# Altium PCB Lora_Node_PCB.PcbDoc
Units mm, origin at the board's own origin, x right, y up, seen from the top; angles counter-clockwise.
Board outline 69.22 x 90.17 mm, 2 copper layers (Top Layer, Bottom Layer); 9 components, 20 nets, 91 pads, 28 vias.
Unrouted connection lines stored in the file: 4.
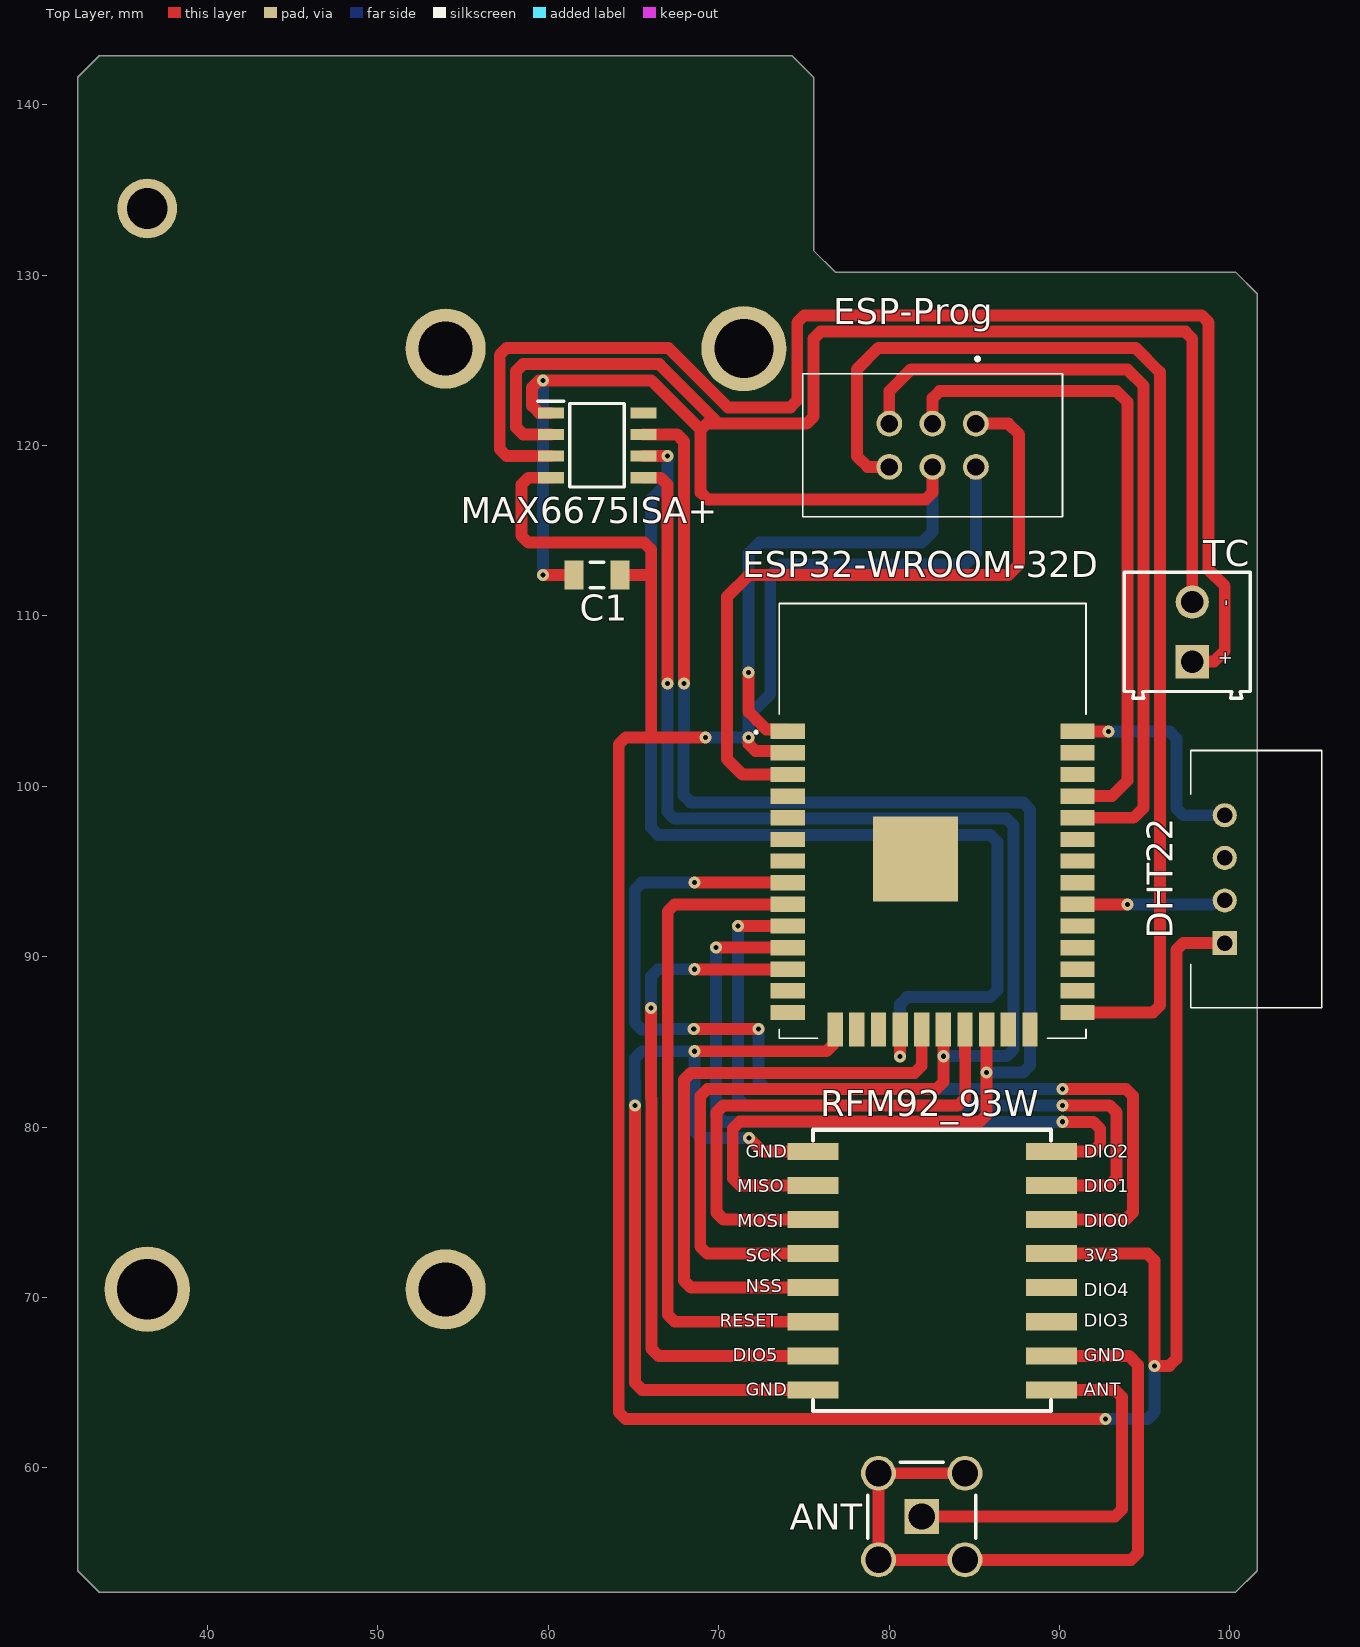
[diagram p0: Top Layer view]
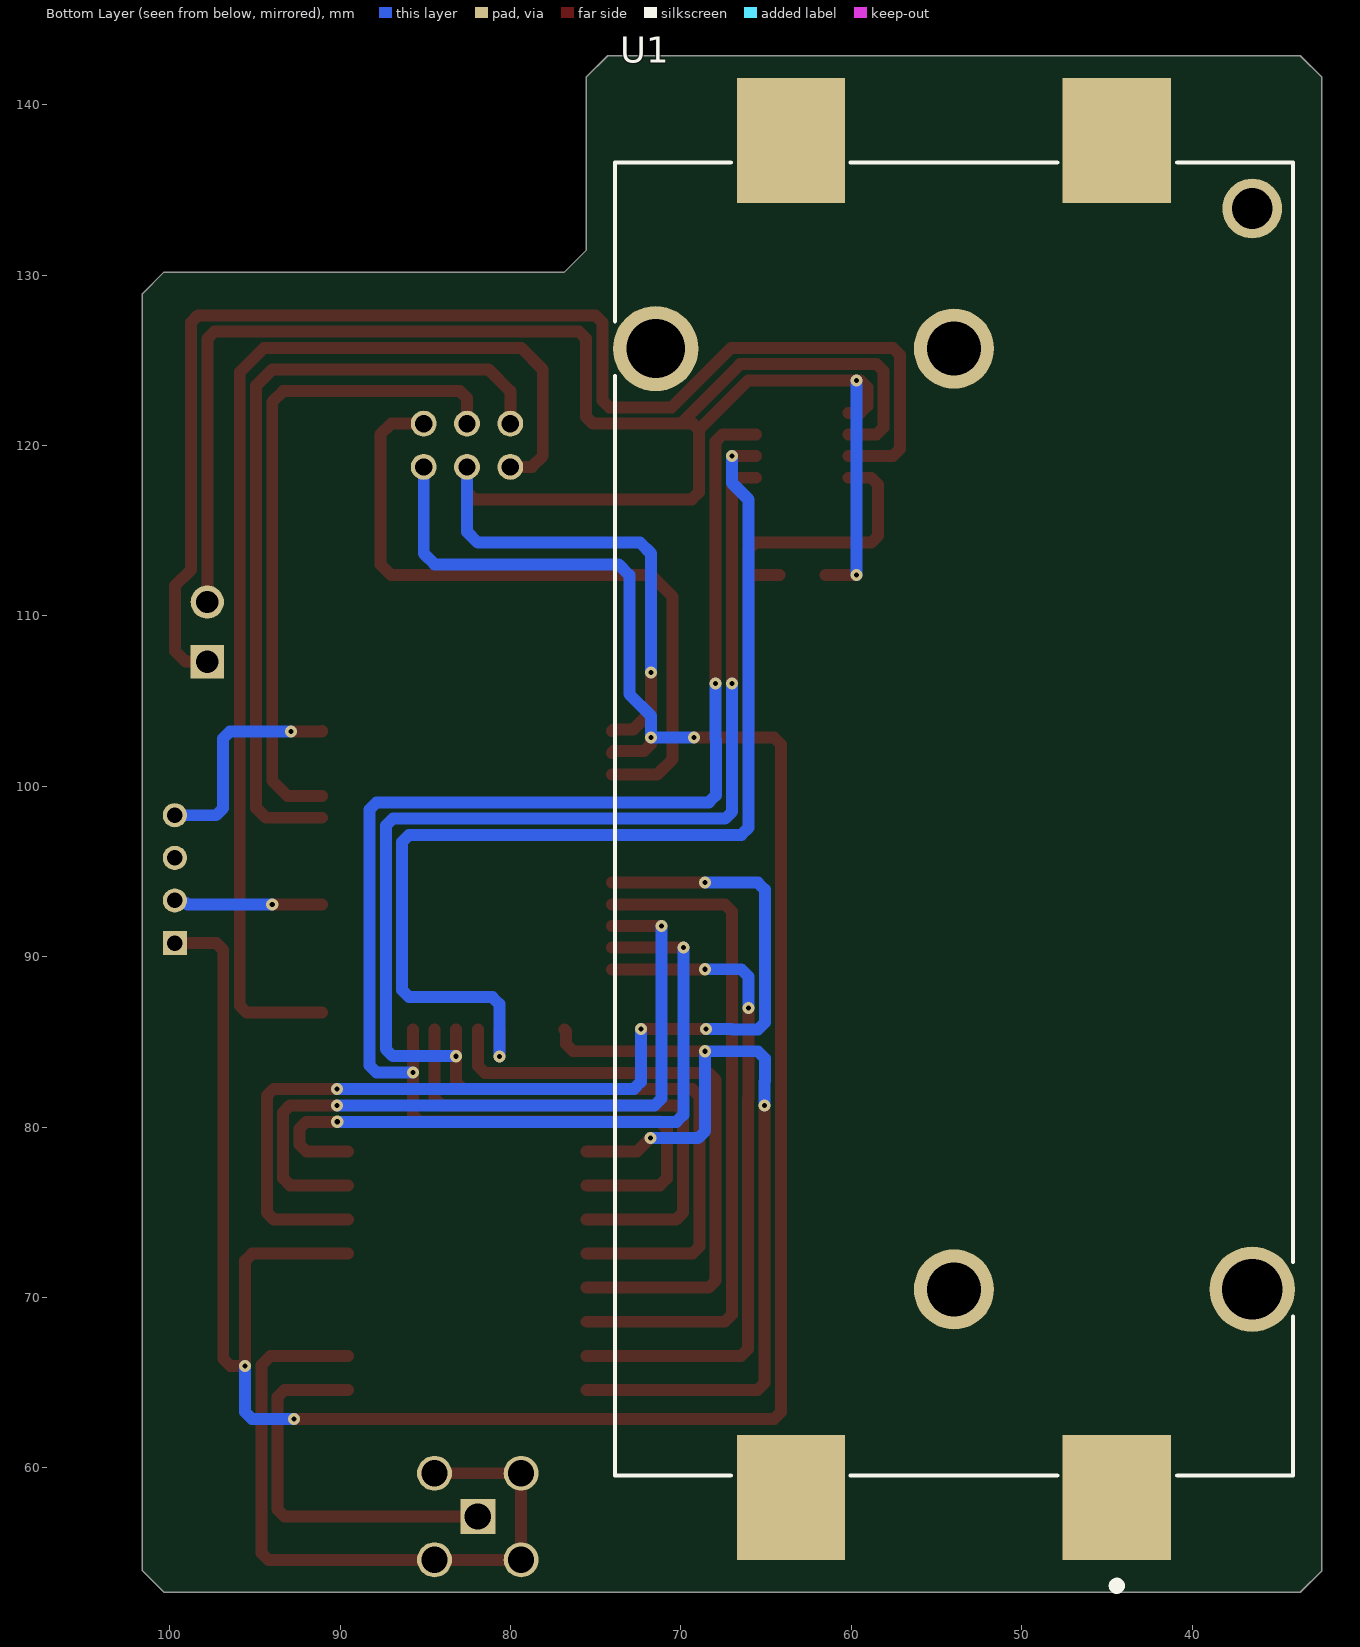
[diagram p1: Bottom Layer view, seen from below]
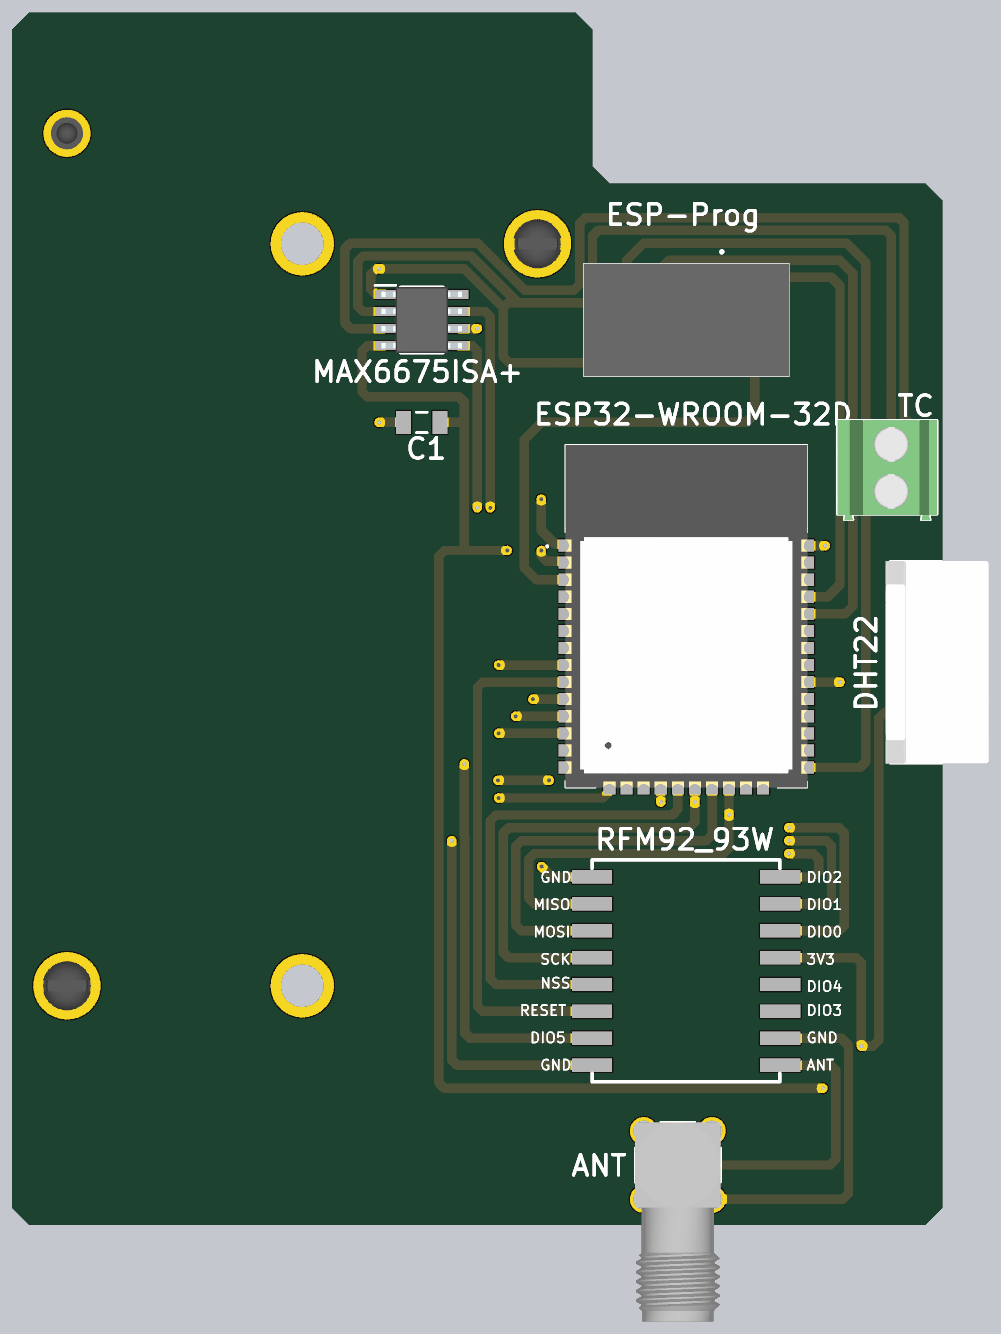
[diagram p2: 3D render of the assembled board from above, using the file's embedded part models]

## Layer stack, top to bottom
Top Solder: solder mask 0.0102, Solder Resist, Dk 3.5
Top Layer: signal copper 0.0356
Dielectric 1: dielectric 0.32, FR-4, Dk 4.8
Bottom Layer: signal copper 0.0356
Bottom Solder: solder mask 0.0102, Solder Resist, Dk 3.5

## Board outline
32.385,53.975 32.385,141.605 33.655,142.875 74.295,142.875 75.565,141.605 75.565,131.445 76.835,130.175 100.33,130.175 101.6,128.905 101.6,53.975 100.33,52.705 33.655,52.705

## Design rules (kind name [scope] priority, off if disabled: settings)
Clearance [All] p1: gap=0.254 ignorepadtopadclearanceinfootprint=FALSE except(0: Arc-Hole Track-Hole SMDPad-Hole THPad-Hole Via-Hole Fill-Hole Poly-Hole Region-Hole Text-Hole)
PolygonConnect [All] p1: connectstyle=Relief reliefconductorwidth=0.254 reliefentries=4 polygonreliefangle="90 Angle" airgapwidth=0.254
RoutingVias [All] p1: holewidth=0.711 width=1.27 viastyle="Through Hole" minholewidth=0.711 minwidth=1.27 maxholewidth=0.711 maxwidth=1.27
SolderMaskExpansion [All] p1: expansion=0.102 istentingtop=FALSE
Width [All] p1: maxlimit=1 minlimit=0.254 preferedwidth=0.7
30 further rules are at their usual default settings.

## Classes and differential pairs
component class Lora_Node_SCH: ANT C1 DHT22 ESP-Prog MAX6675ISA+ RFM92_93W TC U1

## Components (designator, comment, footprint, x,y, rotation, side; value= is the part's Value field where it differs from the comment)
ANT "731000114" MOLX-731000114_V 81.915,57.15 r90 top (schematic designator J?)
C1 "Cap Semi" C1206 62.865,112.395 r0 top value=100nF
DHT22 "DHT22" DHT22 99.695,90.805 r90 top (schematic designator IC?)
ESP32-WROOM-32D "ESP-WROOM-32D" ESPWROOM32D 82.55,97.975 r0 top (schematic designator IC1)
ESP-Prog "30306-6002HB" 303066002HB 85.09,121.285 r180 top (schematic designator J?)
MAX6675ISA+ "MAX6675ISA" SOIC127P600X175-8N 62.865,120.015 r0 top (schematic designator IC3)
RFM92_93W "RFM92_93W" RFM92_93W 75.535,78.58 r0 top (schematic designator U*)
TC "691214110002" 691214110002 97.49,109.065 r90 top (schematic designator J3)
U1 "1048" 1048 36.47,70.485 r90 bottom

## Footprints (in the part's own frame and the unit in brackets; to place one, negate y for a bottom-side part, rotate by r counter-clockwise, add the part's x,y. Pads: shape width x height; smd on the part's side, far side on the other; paste and mask are expansions set on the pad)
1048 [mm]
  rect 7.34x6.35 smd: 1(-12.225,7.95) 2(67.425,7.95) 3(67.425,27.06) 4(-12.225,27.06)
  round 4.7 hole 3.17: 5(0,17.505) 7(55.2,17.505)
  round 5 hole 3.54: 6(0,0)
  round 3.5 hole 2.39: 8(63.42,0)
  round 5 hole 3.45: 9(55.2,35.01)
  silkscreen extent -17.62,-2.38 66.13,37.4, body extent -15.4,-2.39 70.6,37.39, height 15.37
303066002HB [mm]
  round 1.519 hole 1.013: 1(0,0) 2(0,2.54) 3(2.54,0) 4(2.54,2.54) 5(5.08,0) 6(5.08,2.54)
  silkscreen extent -5.08,-3.9 10.16,5.47, body extent -5.08,-2.93 10.16,5.47, height 9.5
691214110002 [mm] "3.50 mm Horizontal Entry Modular, 2p"
  rect 1.95x1.95 hole 1.3: 1(-1.75,-0.3)
  round 1.95 hole 1.3: 2(1.75,-0.3)
  silkscreen extent -3.9,-3.7 3.5,3.7, body extent -3.95,-3.7 3.5,3.7, height 8.55
C1206 [mm] "Chip Capacitor, Body 3.2x1.6mm, IPC High Density"
  rect 1.1x1.7 smd: 1(-1.35,0) 2(1.35,0)
  silkscreen extent -0.4,-0.75 0.4,0.75, body extent -1.7,-0.9 1.7,0.9, height 1.3
DHT22 [mm]
  rect 1.416x1.416 hole 0.91: 1(0,0)
  round 1.416 hole 0.91: 2(2.5,0) 3(5,0) 4(7.5,0)
  silkscreen extent -3.8,-5.7 11.3,2, body extent -3.8,-5.36 11.3,2.34, height 25.27
ESPWROOM32D [mm]
  rect 2x0.9 smd: 1(-8.5,5.26) 2(-8.5,3.99) 3(-8.5,2.72) 4(-8.5,1.45) 5(-8.5,0.18) 6(-8.5,-1.09) 7(-8.5,-2.36) 8(-8.5,-3.63) 9(-8.5,-4.9) 10(-8.5,-6.17) 11(-8.5,-7.44) 12(-8.5,-8.71) 13(-8.5,-9.98) 14(-8.5,-11.25) 25(8.5,-11.25) 26(8.5,-9.98) 27(8.5,-8.71) 28(8.5,-7.44) 29(8.5,-6.17) 30(8.5,-4.9) 31(8.5,-3.63) 32(8.5,-2.36) 33(8.5,-1.09) 34(8.5,0.18) 35(8.5,1.45) 36(8.5,2.72) 37(8.5,3.99) 38(8.5,5.26)
  rect 0.9x2 smd: 15(-5.715,-12.25) 16(-4.445,-12.25) 17(-3.175,-12.25) 18(-1.905,-12.25) 19(-0.635,-12.25) 20(0.635,-12.25) 21(1.905,-12.25) 22(3.175,-12.25) 23(4.445,-12.25) 24(5.715,-12.25)
  rect 5x5 smd: 39(-1,-2.24)
  silkscreen extent -10.4,-12.75 9,12.75, body extent -9,-12.75 9,12.75, height 3.1
MOLX-731000114_V [mm] "Connector, 5-Leads, Body 14.8x6.35mm, Pitch 2.54mm"
  rect 2.05x2.05 hole 1.54: 1(0,0)
  round 2.05 hole 1.54: 2(-2.54,2.54) 3(-2.54,-2.54) 4(2.54,-2.54) 5(2.54,2.54)
  silkscreen extent -1.26,-3.17 3.17,3.17, body extent -11.62,-3.17 3.18,3.18, height 9.57
RFM92_93W [mm]
  rect 3x1 smd: 1(0,0) 2(0,-2) 3(0,-4) 4(0,-6) 5(0,-8) 6(0,-10) 7(0,-12) 8(0,-14) 9(14,-14) 10(14,-12) 11(14,-10) 12(14,-8) 13(14,-6) 14(14,-4) 15(14,-2) 16(14,0)
  silkscreen extent 0,-15.24 13.97,1.27
SOIC127P600X175-8N [mm]
  rect 1.525x0.65 smd: 1(-2.712,1.905) 2(-2.712,0.635) 3(-2.712,-0.635) 4(-2.712,-1.905) 5(2.712,-1.905) 6(2.712,-0.635) 7(2.712,0.635) 8(2.712,1.905)
  silkscreen extent -3.47,-2.45 1.6,2.58, body extent -3,-2.45 3,2.45, height 1.75

## Part data
ANT: library part CMP-2000-05487-1, "SMA Right-Angle PCB Jack Receptacle, Brass Body, Gold Plated, 50 Ohm, 5-Pin THD, RoHS, Tray", Manufacturer=Molex, Package Description="5-Pin Through Hole Device, Body 14.8 x 6.35 mm, Pitch 2.54 mm", Datasheet URL=http://www.molex.com/webdocs/datasheets/pdf/en-us/0731000114_RF_COAX_CONNECTORS.pdf, Datasheet Version=09/2016, Manufacturer URL=http://www.molex.com/, Mounting Technology=ThroughHole, Package Reference=731000114, Package URL=http://www.molex.com/pdm_docs/sd/731000114_sd.pdf
C1: "Capacitor (Semiconductor SIM Model)", LatestRevisionDate=29-May-2009, LatestRevisionNote="IPC-7351 Footprint Added.", PackageDescription="Chip Capacitor", PackageReference=C1206, Published=8-Jun-2000, Publisher="Altium Limited"
DHT22: "Integrated Circuit", Manufacturer_Name="Aosong Electronics", Datasheet Link=https://datasheet4u.com/datasheet-parts/DHT22-datasheet.php?id=792211, Height=25.1mm, Manufacturer_Part_Number=DHT22
ESP32-WROOM-32D: "Integrated Circuit", Manufacturer_Name="Espressif Systems", Mouser Part Number=356-ESP-WROOM-32D, Datasheet Link=https://componentsearchengine.com/Datasheets/1/ESP-WROOM-32D.pdf, Height=3.2mm, Manufacturer_Part_Number=ESP-WROOM-32D, Mouser Price/Stock=https://www.mouser.co.uk/ProductDetail/Espressif-Systems/ESP-WROOM-32D?qs=MLItCLRbWsyWVKgdQMcFuQ%3D%3D
ESP-Prog: "Connector", Manufacturer_Name=3M, Mouser Part Number=517-30306-6002HB, Arrow Part Number=30306-6002HB, Arrow Price/Stock=https://www.arrow.com/en/products/30306-6002hb/3m?region=nac, Datasheet Link=https://componentsearchengine.com/Datasheets/2/30306-6002HB.pdf, Height=9.4mm, Manufacturer_Part_Number=30306-6002HB, Mouser Price/Stock=https://www.mouser.co.uk/ProductDetail/3M-Electronic-Solutions-Division/30306-6002HB?qs=Z%252B4xWyzEAtfSA90BvXHoAA%3D%3D
MAX6675ISA+: "Integrated Circuit", Manufacturer_Name="Maxim Integrated", Mouser Part Number=N/A, Datasheet Link=http://datasheets.maximintegrated.com/en/ds/MAX6675.pdf, Height=1.75mm, Manufacturer_Part_Number=MAX6675ISA, Mouser Price/Stock=https://www.mouser.com/Search/Refine.aspx?Keyword=N%2FA
TC: library part CMP-1502-02464-1, "Serie 2141 - 3.50 mm Horizontal Entry Modular with Rising Cage Clamp WR-TBL, 2 pin", Manufacturer="Wurth Elektronik", Operating Temperature=-40to105degC, Datasheet URL=http://katalog.we-online.de/em/datasheet/6912141100xx.pdf, Manufacturer URL=http://www.we-online.de, Mounting Technology=THT, Package Reference=691214110002, Packaging=Box, Part Number=691214110002, Pin Number=2, Pitch=3.50mm, Publisher=WurthElektronik
U1: "Undefined or Miscellaneous", Manufacturer_Name="Keystone Electronics", Mouser Part Number=534-1048, Datasheet Link=http://www.keyelco.com/product-pdf.cfm?p=920, Manufacturer_Part_Number=1048, Mouser Price/Stock=https://www.mouser.co.uk/ProductDetail/Keystone-Electronics/1048?qs=%2F7TOpeL5Mz5jXkg8vI8Dyw%3D%3D

## Via types
v1: diameter 0.711, hole 0.3, Top Layer to Bottom Layer, 28 vias

## Nets (pads, with @x,y where several pads share a name; then routed paths per layer and width w, separated by ;. In a path a pad name is that pad's centre, name@x,y a point inside that pad or via, vN(x,y) a via of type N, cw(c..) or ccw(c..) an arc to the next point about the centre after c; other vN are vias at no path point)
aaa331: ESP32-WROOM-32D.31
ANT: ANT.1 RFM92_93W.9 | length 22.8
  Top Layer w0.7: ANT.1 93.251,57.15 93.661,57.56 93.661,64.17 93.251,64.58 RFM92_93W.9
DHT_DATA: DHT22.2 ESP32-WROOM-32D.30 | length 8.7
  Top Layer w0.7: ESP32-WROOM-32D.30 93.97,93.075 93.978,93.067 v1(93.981,93.067)
  Bottom Layer w0.7: v1@93.984,93.067 98.951,93.067 99.052,93.168 99.558,93.168 DHT22.2
ESP_EN: ESP32-WROOM-32D.3 ESP-Prog.1 | length 41.8
  Top Layer w0.7: ESP32-WROOM-32D.3 71.39,100.695 70.485,101.6 70.485,111.125 71.755,112.395 86.995,112.395 87.63,113.03 87.63,120.65 86.995,121.285 ESP-Prog.1
ESP_IO0: ESP32-WROOM-32D.25 ESP-Prog.6 | length 68.3
  Top Layer w0.7: ESP-Prog.6 78.74,118.745 78.105,119.38 78.105,124.46 79.372,125.727 94.46,125.727 95.885,124.302 95.885,87.135 95.475,86.725 ESP32-WROOM-32D.25
ESP_MISO: ESP32-WROOM-32D.22 MAX6675ISA+.7 RFM92_93W.2 | length 89.8
  Top Layer w0.7: MAX6675ISA+.7 67.551,120.65 67.964,120.237 v1(67.964,106.045) ; RFM92_93W.2 71.234,76.58 70.824,76.99 70.824,79.916 71.234,80.326 85.315,80.326 85.725,80.736 v1(85.725,83.204) ESP32-WROOM-32D.22
  Bottom Layer w0.7: v1(67.964,106.045) 67.964,102.773 67.945,102.754 67.945,99.473 68.355,99.063 87.855,99.063 88.265,98.653 88.265,83.615 87.855,83.204 v1(85.725,83.204)
ESP_MOSI: ESP32-WROOM-32D.21 RFM92_93W.3 | length 30.7
  Top Layer w0.7: RFM92_93W.3 70.28,74.58 69.87,74.99 69.87,80.87 70.28,81.28 84.045,81.28 84.466,81.701 84.466,84.161 84.464,84.163 84.464,85.716 ESP32-WROOM-32D.21
ESP_RXD: ESP32-WROOM-32D.34 ESP-Prog.5 | length 46.6
  Top Layer w0.7: ESP-Prog.5 80.01,123.19 81.28,124.46 93.98,124.46 94.931,123.509 94.931,98.741 94.345,98.155 ESP32-WROOM-32D.34
ESP_SCK: ESP32-WROOM-32D.20 MAX6675ISA+.5 RFM92_93W.4 | length 92.2
  Top Layer w0.7: MAX6675ISA+.5 66.586,118.11 67,117.697 v1(67,106.045) ; RFM92_93W.4 69.326,72.58 68.916,72.99 68.916,81.824 69.326,82.234 82.775,82.234 83.188,82.647 v1(83.188,84.162) v1(83.188,84.162) 83.187,85.723 ESP32-WROOM-32D.20
  Bottom Layer w0.7: v1(67,106.045) 67,103.157 66.991,103.149 66.991,98.519 67.401,98.109 68.58,98.109 86.901,98.109 87.311,97.699 87.311,84.574 86.901,84.164 83.19,84.164 v1(83.188,84.162)
ESP_TXD: ESP32-WROOM-32D.35 ESP-Prog.3 | length 38.9
  Top Layer w0.7: ESP-Prog.3 82.55,122.78 82.96,123.19 93.345,123.19 93.977,122.558 93.977,100.327 93.075,99.425 ESP32-WROOM-32D.35
GND: ANT.2 ANT.3 ANT.4 ANT.5 C1.1 DHT22.4 ESP32-WROOM-32D.1 ESP32-WROOM-32D.15 ESP32-WROOM-32D.38 ESP32-WROOM-32D.39 ESP-Prog.4 MAX6675ISA+.1 MAX6675ISA+.2 RFM92_93W.1 RFM92_93W.8 RFM92_93W.10 TC.2 | length 251.5
  Top Layer w0.7: v1(59.69,112.395) C1.1 ; MAX6675ISA+.2 58.514,120.65 58.104,121.06 58.104,124.366 58.514,124.776 66.519,124.776 70.01,121.285 ; MAX6675ISA+.1 59.465,121.92 59.055,122.33 59.055,123.415 59.465,123.825 v1(59.69,123.825) 66.04,123.825 68.94,120.925 ; v1(65.095,81.28) 65.095,81.277 65.089,81.272 65.089,64.99 65.499,64.58 RFM92_93W.8 ; v1(68.58,84.455) 76.325,84.455 76.735,84.865 76.735,85.625 ESP32-WROOM-32D.15 ; v1(71.755,106.68) 71.755,104.37 72.25,103.875 72.79,103.335 73.95,103.335 ESP32-WROOM-32D.1 ; v1(71.784,79.356) 71.786,79.356 72.565,78.577 75.532,78.577 RFM92_93W.1 ; ESP-Prog.4 82.55,117.25 82.14,116.84 69.35,116.84 68.94,117.25 68.94,120.925 ; ANT.4 ANT.5 ANT.2 ANT.3 94.205,54.61 94.615,55.02 94.615,66.04 94.075,66.58 RFM92_93W.10 ; ESP32-WROOM-32D.38 91.058,103.227 92.882,103.227 v1(92.884,103.225) ; TC.2 97.79,126.271 97.38,126.681 75.975,126.681 75.565,126.271 75.565,121.695 75.155,121.285 70.01,121.285 ; 68.94,120.925 69.3,121.285 70.01,121.285
  Bottom Layer w0.7: v1(59.69,112.395) v1(59.69,123.825) ; v1(65.095,81.28) 65.092,81.282 65.092,82.685 65.075,82.702 65.075,84.043 65.485,84.453 68.578,84.453 v1(68.58,84.455) 68.58,79.766 68.99,79.356 v1(71.784,79.356) ; v1(71.755,106.68) 71.755,113.665 72.39,114.3 81.915,114.3 82.55,114.935 ESP-Prog.4 ; v1(92.884,103.225) 96.452,103.225 96.862,102.815 96.862,98.715 97.272,98.305 DHT22.4
TC_CS: ESP32-WROOM-32D.18 MAX6675ISA+.6 | length 63.7
  Top Layer w0.7: MAX6675ISA+.6 v1(67.002,119.38) ; v1@80.646,84.148 ESP32-WROOM-32D.18
  Bottom Layer w0.7: v1(67.002,119.38) 67.002,117.802 66.031,116.831 66.031,97.571 66.447,97.155 68.58,97.155 85.947,97.155 86.357,96.745 86.357,88.04 85.947,87.63 81.057,87.63 80.647,87.22 v1(80.647,84.148)
TC_T+: MAX6675ISA+.3 TC.1 | length 78.8
  Top Layer w0.7: MAX6675ISA+.3 57.56,119.38 57.15,119.79 57.15,125.32 57.56,125.73 67.045,125.73 70.536,122.239 74.201,122.239 74.611,122.649 74.611,127.225 75.021,127.635 98.334,127.635 98.744,127.225 98.744,112.711 99.695,111.76 99.695,107.95 99.06,107.315 TC.1
TR_CS: ESP32-WROOM-32D.19 RFM92_93W.5 | length 36
  Top Layer w0.7: RFM92_93W.5 68.372,70.58 67.962,70.99 67.962,82.778 68.372,83.188 81.505,83.188 81.915,83.598 ESP32-WROOM-32D.19
TR_DIO0: ESP32-WROOM-32D.8 RFM92_93W.14 | length 61.6
  Top Layer w0.7: v1@68.54,85.772 68.542,85.771 68.546,85.771 68.549,85.773 72.333,85.773 72.338,85.768 v1@72.339,85.77 ; v1(68.583,94.349) 68.586,94.349 68.59,94.345 ESP32-WROOM-32D.8 ; RFM92_93W.14 93.889,74.58 94.299,74.99 94.299,81.835 93.889,82.245 v1(90.17,82.245)
  Bottom Layer w0.7: v1(68.537,85.768) 67.029,85.768 66.986,85.725 65.482,85.725 65.072,86.135 65.072,93.939 65.482,94.349 v1(68.583,94.349) ; v1(72.343,85.766) 72.343,82.655 72.753,82.245 v1(90.17,82.245)
TR_DIO1: ESP32-WROOM-32D.10 RFM92_93W.15 | length 43.5
  Top Layer w0.7: v1(71.128,91.807) ESP32-WROOM-32D.10@74.049,91.806 ; RFM92_93W.15 92.935,76.58 93.345,76.99 93.345,80.87 92.935,81.28 v1(90.17,81.28)
  Bottom Layer w0.7: v1(71.128,91.807) 71.127,81.69 71.537,81.28 v1(90.17,81.28)
TR_DIO2: ESP32-WROOM-32D.11 RFM92_93W.16 | length 40.8
  Top Layer w0.7: v1@69.852,90.533 71.965,90.533 71.966,90.534 74.049,90.534 ESP32-WROOM-32D.11 ; RFM92_93W.16 91.981,78.58 92.391,78.99 92.391,79.905 91.981,80.315 v1(90.164,80.315)
  Bottom Layer w0.7: v1(69.849,90.533) 69.85,80.725 70.26,80.315 v1(90.164,80.315)
TR_DIO5: ESP32-WROOM-32D.12 RFM92_93W.7 | length 39.7
  Top Layer w0.7: v1(66.035,86.995) 66.035,81.697 66.054,81.677 66.054,66.99 66.464,66.58 RFM92_93W.7 ; v1@68.589,89.265 v1@68.59,89.265 ; v1@68.591,89.264 ESP32-WROOM-32D.12@74.049,89.264
  Bottom Layer w0.7: v1(66.035,86.995) 66.035,88.852 66.45,89.267 v1@68.585,89.267
  other v1: 68.585,89.267
TR_RESET: ESP32-WROOM-32D.9 RFM92_93W.6 | length 39.6
  Top Layer w0.7: ESP32-WROOM-32D.9 67.418,93.075 67.008,92.665 67.008,68.99 67.418,68.58 RFM92_93W.6
VDD: C1.2 DHT22.1 ESP32-WROOM-32D.2 ESP-Prog.2 MAX6675ISA+.4 RFM92_93W.13 | length 178.6
  Top Layer w0.7: MAX6675ISA+.4 58.83,118.11 58.42,117.7 58.42,114.71 58.83,114.3 65.63,114.3 66.04,113.89 66.04,112.395 ; C1.2 66.04,112.395 ; v1(69.224,102.87) 66.04,102.87 ; v1(71.755,102.87) 71.757,102.868 71.757,102.478 72.171,102.065 73.95,102.065 ESP32-WROOM-32D.2 ; RFM92_93W.13 95.164,72.58 95.575,72.17 v1(95.575,65.99) 96.442,65.99 96.852,66.4 96.852,90.395 97.263,90.805 DHT22.1 ; v1(92.701,62.865) 64.545,62.865 64.135,63.275 64.135,102.46 64.545,102.87 66.04,102.87 ; 66.04,102.87 66.04,112.395
  Bottom Layer w0.7: v1(69.224,102.87) v1(71.755,102.87) 71.755,104.14 73.025,105.41 73.025,112.395 73.66,113.03 84.455,113.03 85.09,113.665 ESP-Prog.2@85.09,118.726 ; v1(92.701,62.865) 95.164,62.865 95.575,63.275 v1(95.575,65.99)
pads on no net: DHT22.3 ESP32-WROOM-32D.4 ESP32-WROOM-32D.5 ESP32-WROOM-32D.6 ESP32-WROOM-32D.7 ESP32-WROOM-32D.13 ESP32-WROOM-32D.14 ESP32-WROOM-32D.16 ESP32-WROOM-32D.17 ESP32-WROOM-32D.23 ESP32-WROOM-32D.24 ESP32-WROOM-32D.26 ESP32-WROOM-32D.27 ESP32-WROOM-32D.28 ESP32-WROOM-32D.29 ESP32-WROOM-32D.32 ESP32-WROOM-32D.33 ESP32-WROOM-32D.36 ESP32-WROOM-32D.37 MAX6675ISA+.8 RFM92_93W.11 RFM92_93W.12 U1.1 U1.2 U1.3 U1.4 U1.5 U1.6 U1.7 U1.8 U1.9

## Silkscreen, mask and mechanical layers (free items; w line width, h text height)
Top Overlay:
  text "-" at 100.082,110.56 h0.76 r90
  text "+" at 100.073,107.066 h0.76 r90
Mechanical 1:
  lines w0.25: 32.385,53.975 33.655,52.705 ; 32.385,53.975 32.385,53.975 ; 32.385,53.975 32.385,141.605 33.655,142.875 74.295,142.875 75.565,141.605 75.565,131.445 76.835,130.175 100.33,130.175 101.6,128.905 ; 33.655,52.705 33.655,52.705 ; 33.655,52.705 100.33,52.705 101.6,53.975 101.6,128.905 ; 101.6,128.905 101.6,128.905

## Text inside footprints (layer, text, board x,y; h text height)
RFM92_93W: Top Overlay "ANT" at 91.41,64.229 h0.76; Top Overlay "GND" at 91.41,66.261 h0.76; Top Overlay "DIO3" at 91.41,68.293 h0.76; Top Overlay "DIO4" at 91.41,70.071 h0.76; Top Overlay "3V3" at 91.41,72.103 h0.76; Top Overlay "DIO0" at 91.41,74.135 h0.76; Top Overlay "DIO1" at 91.41,76.167 h0.76; Top Overlay "DIO2" at 91.41,78.199 h0.76; Top Overlay "GND" at 71.598,64.229 h0.76; Top Overlay "DIO5" at 70.836,66.261 h0.76; Top Overlay "RESET" at 70.074,68.293 h0.76; Top Overlay "NSS" at 71.598,70.325 h0.76; Top Overlay "SCK" at 71.598,72.103 h0.76; Top Overlay "MOSI" at 71.09,74.135 h0.76; Top Overlay "MISO" at 71.09,76.167 h0.76; Top Overlay "GND" at 71.598,78.199 h0.76